# EAGLE board VL53L1X (EAGLE 8.3.2)
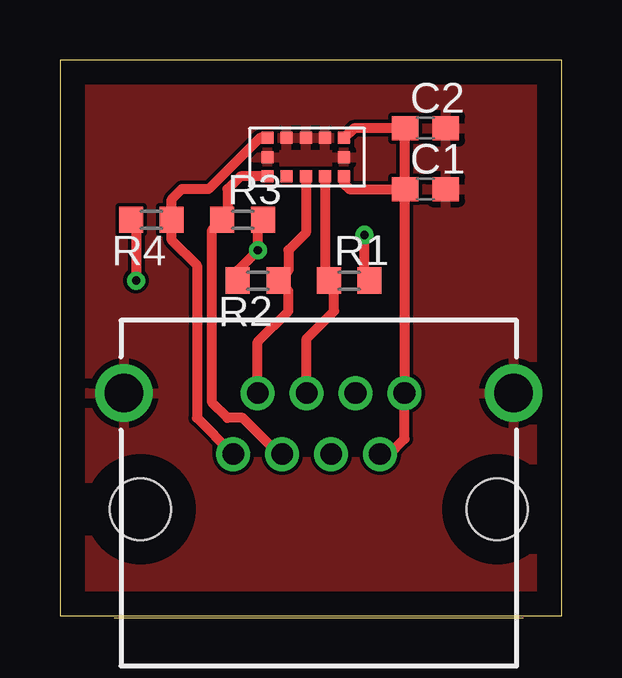
[diagram p0: board, top side]
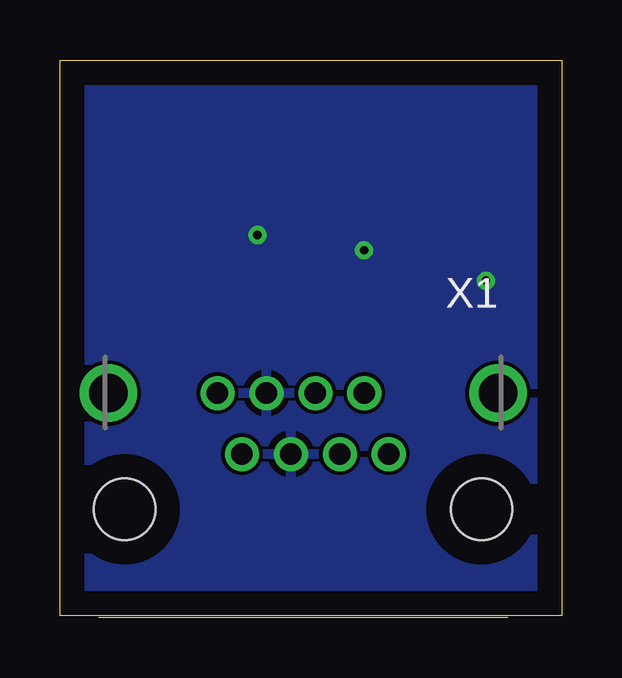
[diagram p1: board, bottom side, seen from below]

Size 20.93 x 23.16 mm. Coordinates in mm from the lower left corner, seen from the top.
Outline: 0,0 20.93,0 20.93,23.16 0,23.16 0,0
Copper layers (1*16): Top 0.035mm / dielectric 1.5mm / Bottom 0.035mm
Design rules "default": minimum track width 6mil, minimum drill 0.35mm, track to track 6mil, track to pad 6mil, pad to pad 6mil, via to via 6mil, smd to smd 6mil, copper to edge 40mil, drill to drill 6mil, minimum pad ring 10mil, minimum via ring 8mil, stop-mask expansion 4mil, vias tented up to drill 0mil, thermal gap 10mil

## Footprints (pad centres in the part's own frame; a part is rotated, then mirrored left to right if it is on the bottom)
C0603 = smd 1.1 x 1: 1 -0.85,0; 2 0.85,0
R0603 = smd 1 x 1.1: 1 -0.85,0; 2 0.85,0
VL53L1X = smd 0.5 x 0.5: AVDD 0.85,2; AVDDVCSEL 0.85,0.4; AVSSVCSEL 1.65,0.4; DNC 3.25,2; GND 2.45,0.4; GND2 3.25,0.4; GND3 4.05,1.2; GND4 0.85,1.2; GPIO1 4.05,2; SCL 1.65,2; SDA 2.45,2; XSHUT 4.05,0.4
GLX-S-88M = drill 0.9 pad 1.422: 1 -3.57,-2.3; 2 -2.55,-4.84; 3 -1.53,-2.3; 4 -0.51,-4.84; 5 0.51,-2.3; 6 1.53,-4.84; 7 2.55,-2.3; 8 3.57,-4.84 | drill 1.6 pad 2.184: S1 -8.125,-4.84; S2 8.125,-4.84 | hole 2.55: -7.44,0; 7.44,0

## Placement (x,y rotation side)
C1  100n  [C0603]  15.24,17.78 0 top
C2  45u  [C0603]  15.24,20.32 0 top
R1  10k  [R0603]  12.06,13.97 0 top
R2  10k  [R0603]  8.26,13.97 180 top
R3  10k  [R0603]  7.62,16.51 0 top
R4  10k  [R0603]  3.81,16.51 180 top
U$1  VL53L1X  [VL53L1X]  12.7,20.32 180 top
X1  GLX-S-88M  [GLX-S-88M]  10.79,4.45 180 bottom

## Library data of the parts
C1 C2 R1-R4 = rcl
U$1 = LIDAR
X1 = con-kycon; OC_FARNELL: unknown; OC_NEWARK: unknown

## Nets
AVDD: C1.1 C2.1 U$1.AVDD U$1.AVDDVCSEL X1.7 X1.8
GND: C1.2 C2.2 U$1.AVSSVCSEL U$1.GND U$1.GND2 U$1.GND3 U$1.GND4 X1.S1 X1.S2
GPIO1: R3.1 U$1.GPIO1 X1.3
IOVDD: R1.2 R2.2 R3.2 R4.2 X1.5 X1.6
SCL: R1.1 U$1.SCL X1.4
SDA: R2.1 U$1.SDA X1.2
XSHUT: R4.1 U$1.XSHUT X1.1

## Tracks (layer width: path | path; a pad name or v marks a point on that pad's centre or on a via)
AVDD
  Top 0.406: X1.7 13.59,6.99 13.97,6.99 14.37,7.38 X1.8 14.37,17.75 | 14.37,17.75 C1.1 C2.1 12.25,20.32 U$1.AVDDVCSEL | U$1.AVDD 11.85,18 12.06,17.78 14.34,17.78 14.37,17.75
GND
  pour Top: 0,0 0,24.13 22.23,24.13 22.23,0
GPIO1
  Top 0.406: X1.3 9.13,6.75 7.62,8.26 6.99,8.26 6.35,8.89 6.35,16.09 R3.1 6.99,16.73 6.99,17.78 7.53,18.32 U$1.GPIO1
IOVDD  (via drill 0.35)
  Top 0.406: R4.2 3.17,16.51 v3.17,13.97 | R2.2 7.41,14.39 v8.26,15.24 8.26,16.3 R3.2 | R1.2 12.7,13.97 v12.7,15.88
  pour Bottom: 0,25.4 22.86,25.4 22.86,-0.64 -0.64,-0.64 -0.64,25.4
SCL
  Top 0.406: U$1.SCL 11.05,14.13 R1.1 11.43,13.76 11.43,12.7 10.29,11.55 X1.4
SDA
  Top 0.406: U$1.SDA 10.25,15.96 9.53,15.24 9.53,14.39 R2.1 9.53,13.55 9.53,12.7 8.24,11.42 X1.2
XSHUT
  Top 0.406: X1.1 5.71,8.26 5.71,14.61 4.66,15.66 R4.1 4.66,17.36 5.08,17.78 6.2,17.78 8.34,19.92 U$1.XSHUT